# Altium PCB ROV_PCB_CHARGE.PcbDoc
Units mil, origin at the board's own origin, x right, y up, seen from the top; angles counter-clockwise.
Board outline 2755.91 x 1948.72 mil, 2 copper layers (Top Layer, Bottom Layer); 11 components, 12 nets, 52 pads, 0 vias.
Unrouted connection lines stored in the file: 4.
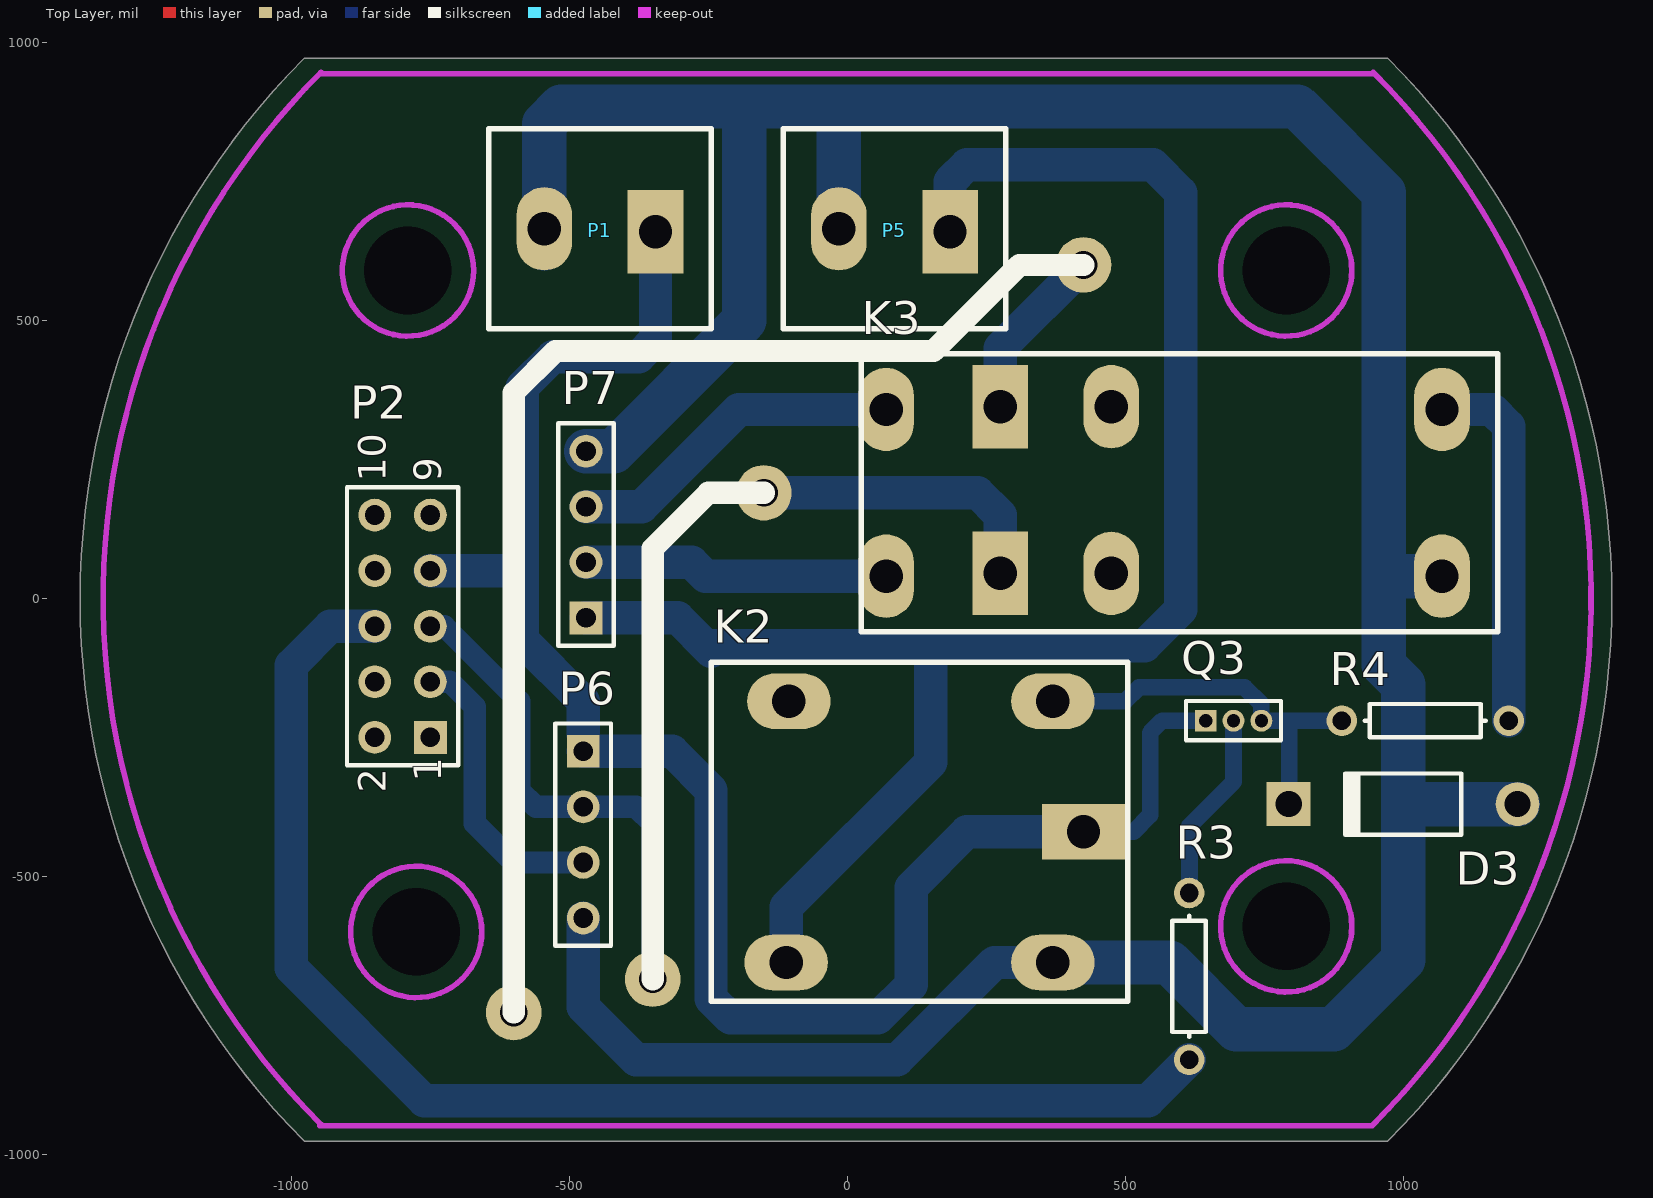
[diagram p0: Top Layer view]
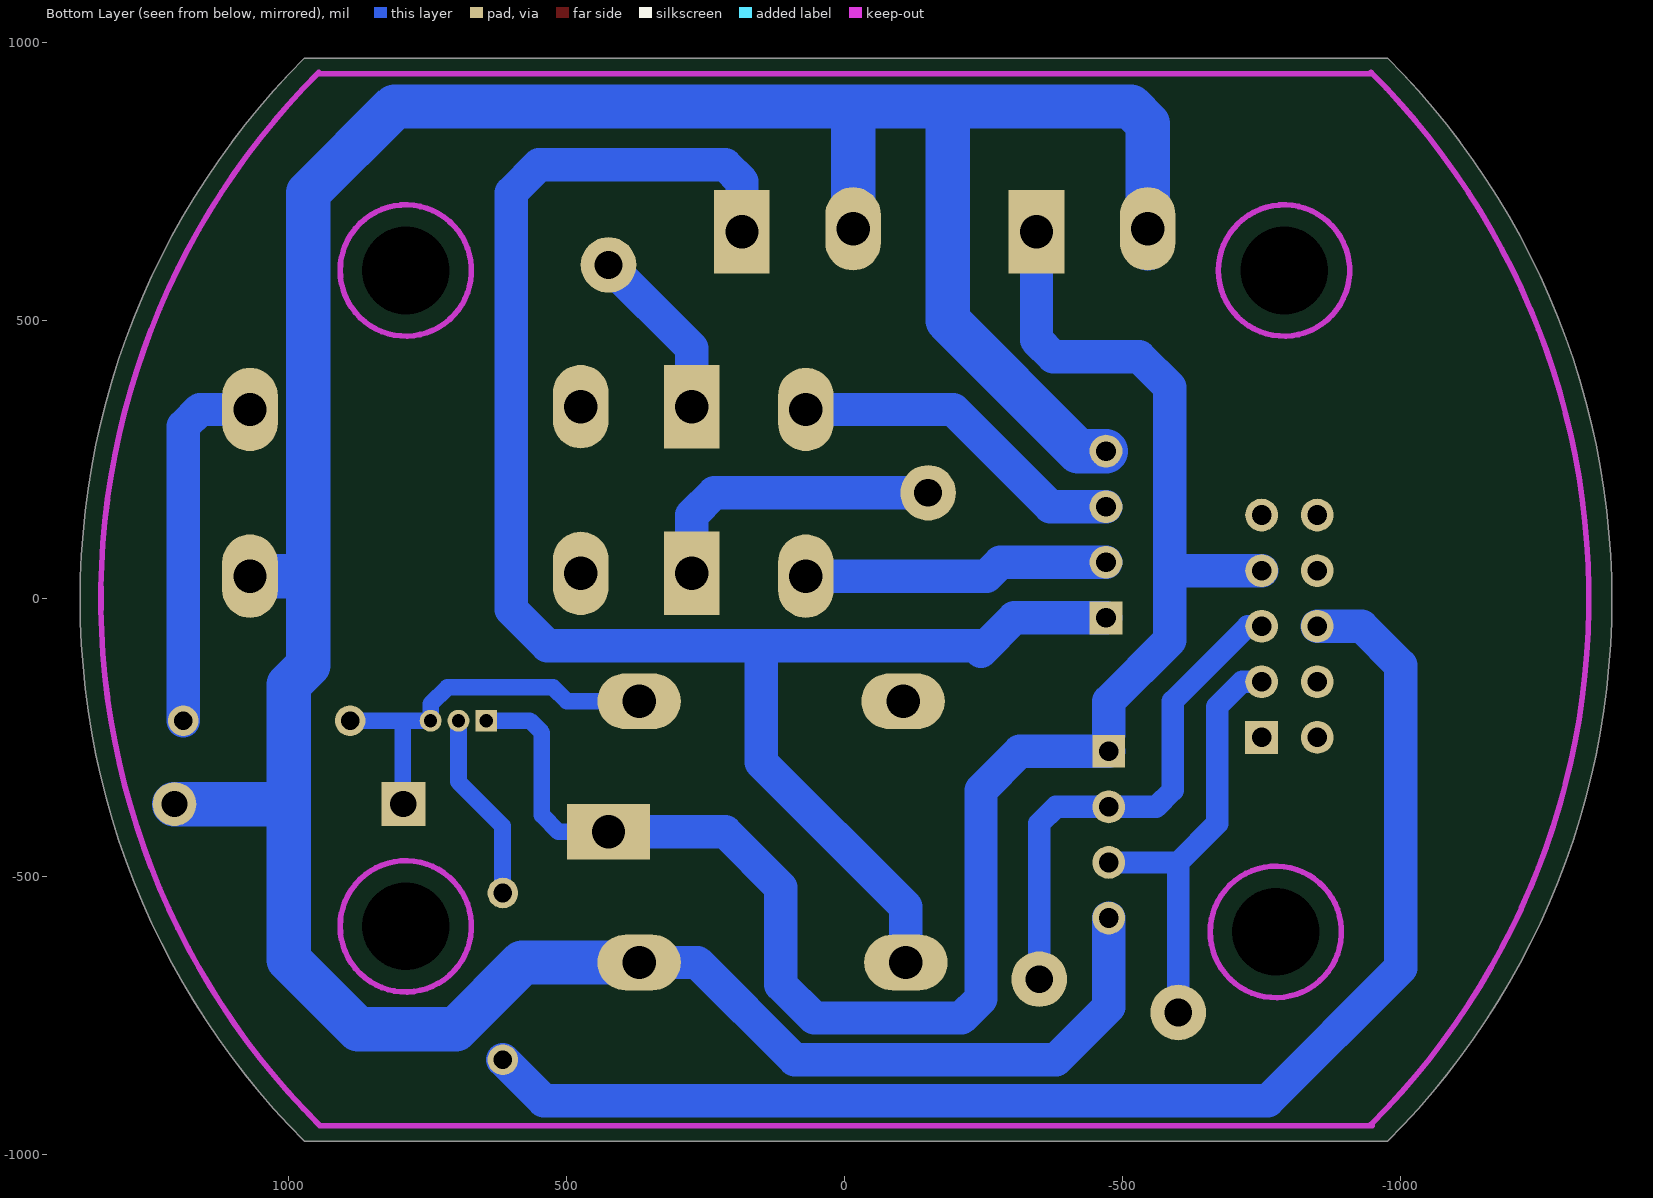
[diagram p1: Bottom Layer view, seen from below]

## Layer stack, top to bottom
Top Solder: solder mask 0.4, Solder Resist, Dk 3.5
Top Layer: signal copper 1.4
Dielectric 1: dielectric 12.6, FR-4, Dk 4.8
Bottom Layer: signal copper 1.4
Bottom Solder: solder mask 0.4, Solder Resist, Dk 3.5

## Board outline
-976.6,-976.6 972.12,-976.6 ccw(c-2.24,-2.24) 972.12,972.12 -976.6,972.12 ccw(c-2.24,-2.24)

## Design rules (kind name [scope] priority, off if disabled: settings)
Clearance [All] p1: gap=10
PolygonConnect [All] p1: connectstyle=Relief reliefconductorwidth=10 reliefentries=4 polygonreliefangle="90 Angle" airgapwidth=10
RoomDefinition ROV_PCB_CHARGE [InComponentClass('ROV_PCB_CHARGE')] p1: confinementstyle=ConfineOut formatcopy=TRUE lockcomponents=FALSE outline 1420,-920 4850,-920 4850,355 1420,355
RoutingVias [All] p1: holewidth=28 width=50 viastyle="Through Hole" minholewidth=28 minwidth=50 maxholewidth=28 maxwidth=50
SolderMaskExpansion [All] p1: expansion=4
Width [All] p1: maxlimit=80 minlimit=10 preferedwidth=40 minimp=50.000000 maximp=50.000000 favimp=50.000000
30 further rules are at their usual default settings.

## Components (designator, comment, footprint, x,y, rotation, side; value= is the part's Value field where it differs from the comment)
D3 "1N4007" DO-41 1000,-370 r180 top
K2 "Elmatis br.151" REL151 130,-420 r270 top
K3 "Elmatis br.112" REL112 595,190 r270 top
P1 "Battery" KLEMA -445,665 r180 top
P2 "Header logic" HDR2X5 -750,-250 r90 top
P5 "Charger power" KLEMA 85,665 r180 top
P6 "Battery balance" HDR1X4 -475,-275 r270 top
P7 "Charger balance" HDR1X4 -470,-35 r90 top
Q3 "PNP 2N3906" MHDR1X3 645,-220 r0 top
R3 "10k" AXIAL-0.3 615,-680 r90 top
R4 "47" AXIAL-0.3 1040,-220 r180 top

## Footprints (in the part's own frame and the unit in brackets; to place one, negate y for a bottom-side part, rotate by r counter-clockwise, add the part's x,y. Pads: shape width x height; smd on the part's side, far side on the other; paste and mask are expansions set on the pad)
AXIAL-0.3 [mm] "Axial Device, Thru-Hole; 2 Leads; 0.3 in Pin Spacing"
  round 1.4 hole 0.85: 1(-3.81,0) 2(3.81,0)
  silkscreen extent -2.77,-0.76 2.77,0.76
DO-41 [mm] "Diode, Axial; Body 5.2 x 2.7 mm (LxDia. max), Lead Dia. 0.86 mm (max)"
  round 2 hole 1.2: 1(-5.23,0)
  rect 2x2 hole 1.2: 2(5.23,0)
  silkscreen extent -2.65,-1.4 2.75,1.4
HDR1X4 [mm] "Connector; Header; 4 Position"
  rect 1.5x1.5 hole 0.9: 1(0,0)
  round 1.5 hole 0.9: 2(2.54,0) 3(5.08,0) 4(7.62,0)
  silkscreen extent -1.27,-1.27 8.89,1.27
HDR2X5 [mm] "Connector; Header; 5x2 Position"
  rect 1.5x1.5 hole 0.9: 1(0,0)
  round 1.5 hole 0.9: 2(0,2.54) 3(2.54,0) 4(2.54,2.54) 5(5.08,0) 6(5.08,2.54) 7(7.62,0) 8(7.62,2.54) 9(10.16,0) 10(10.16,2.54)
  silkscreen extent -1.27,-1.27 11.43,3.81
KLEMA [mil]
  rect 100x150 hole 60: 1(-100,5)
  oval 100x150 hole 60: 2(100,0)
  silkscreen extent -200,-180 200,180
MHDR1X3 [mm] "Connector; Header; 3 Position"
  rect 1x1 hole 0.6: 1(0,0)
  round 1 hole 0.6: 2(1.27,0) 3(2.54,0)
  silkscreen extent -0.9,-0.9 3.44,0.9
REL112 [mil]
  rect 150x100 hole 60: 1(-155,-320) 3(145,-320)
  oval 150x100 hole 60: 2(-150,-525) 4(150,-525) 5(-150,475) 6(150,475) 7(-155,-120) 8(145,-120)
  silkscreen extent -250,-570 250,575
REL151 [mil]
  rect 100x150 hole 60: 1(0,295)
  oval 100x150 hole 60: 2(235,-240) 3(-235,240) 4(235,240) 5(-235,-235)
  silkscreen extent -305,-375 305,375

## Part data
D3: library part "Diode 1N4007", "1 Amp General Purpose Rectifier"
K2: library part Relay-SPST, "Single-Pole Single-Throw Relay"
K3: library part Relay-DPST, "Dual-Pole Single-Throw Relay"
P1 P5: library part "Header 2", "Header, 2-Pin"
P2: library part "Header 5X2", "Header, 5-Pin, Dual row"
P6 P7: library part "Header 4", "Header, 4-Pin"
Q3: library part PNP, "PNP Bipolar Transistor"
R3 R4: library part Res1, "Resistor"

## Free pads (board coordinates)
  round 50 hole 157.48: 0(-790.28,590) 0(-775.54,-600) 0(789.72,-590) 0(789.72,590)
  round 100 hole 50: 2(-350,-685) 3(-150,190) 4(425,600) 5(-600,-745)

## Nets (pads, with @x,y where several pads share a name; then routed paths per layer and width w, separated by ;. In a path a pad name is that pad's centre, name@x,y a point inside that pad or via, vN(x,y) a via of type N, cw(c..) or ccw(c..) an arc to the next point about the centre after c; other vN are vias at no path point)
DGND: P2.8 P2.9 P2.10
GND: D3.1 K2.4 K3.6 P1.2 P5.2 P6.4 P7.4 | length 6322.3
  Bottom Layer w60: P6.4 -475,-735 -380,-830 90,-830 265,-655 K2.4
  Bottom Layer w80: P1.2@-545,630 -545,854.28 -514.28,885 -185,885 ; P7.4 -420,265 -185,500 -185,885 ; P5.2 -15,885 ; K2.4 580,-655 700,-775 875,-775 1000,-650 1000,-155 965,-120 965,730 810,885 -15,885 ; 970,40 K3.6 ; 1025,-370 D3.1 ; -185,885 -15,885
NetD3_2: D3.2 K2.3 Q3.3 R4.2 | length 721.9
  Bottom Layer w30: K2.3 500,-185 525,-160 715,-160 745,-190 Q3.3 795,-220 ; D3.2@795,-369.09 795,-220 ; R4.2 795,-220
NetK2_2: K2.2 P5.1 P7.1 | length 3087.6
  Bottom Layer w60: P7.1 -305,-35 -245,-95 ; -245,-85 150,-85 ; K2.2 -110,-555 150,-295 150,-85 ; P5.1 185,750 215,780 550,780 600,730 600,-20 535,-85 150,-85
NetK3_1: K3.1 P2.3 P6.3 pad.4 pad.5 | length 1119.8
  Bottom Layer w40: P2.3 -715,-150 -670,-195 -670,-405 -600,-475 ; pad.5 -600,-475 ; P6.3 -600,-475
  Bottom Layer w60: K3.1 275,450 pad.4
NetK3_2: K3.2 P7.3 | length 612.5
  Bottom Layer w60: P7.3 -370,165 -195,340 K3.2
NetK3_3: K3.3 P2.5 P6.2 pad.2 pad.3 | length 1467.3
  Bottom Layer w40: P2.5 -725,-50 -590,-185 -590,-345 -560,-375 P6.2 -380,-375 -350,-405 pad.2
  Bottom Layer w60: pad.3 235,190 275,150 K3.3
NetK3_4: K3.4 P7.2 | length 550.4
  Bottom Layer w60: P7.2 -280,65 -255,40 K3.4
NetK3_5: K3.5 R4.1 | length 662.4
  Bottom Layer w60: K3.5 1160,340 1190,310 R4.1
NetP2_6: P2.6 R3.1 | length 2468.4
  Bottom Layer w60: P2.6 -930,-50 -1000,-120 -1000,-665 -761.23,-903.77 541.24,-903.77 R3.1
NetQ3_2: Q3.2 R3.2 | length 342.8
  Bottom Layer w30: R3.2@615.77,-530 615.77,-409.23 695,-330 Q3.2
VBATT: K2.1 P1.1 P2.7 P6.1 Q3.1 | length 3255.3
  Bottom Layer w30: K2.1 515,-420 545,-390 545,-241.57 566.57,-220 Q3.1
  Bottom Layer w60: P2.7 -585,50 ; P6.1 -315,-275 -245,-345 -245,-720 -210,-755 55,-755 115,-695 115,-520 215,-420 K2.1 ; -475,-245 -475,-185 -585,-75 -585,380 -530,435 -375,435 -345,465 P1.1
pads on no net: K2.5 K3.7 K3.8 P2.1 P2.2 P2.4

## Keep-outs
Keep-Out Layer:
  circle w10: c-790.28,590 r118.11
  circle w10: c789.72,590 r118.11
  circle w10: c-775.54,-600 r118.11
  circle w10: c789.72,-590 r118.11
  lines w10: -948.8,-948.77 944.24,-948.77 ; -948.8,944.28 944.24,944.28 ; -946.8,-946.52 cw(c-0.28,0) -946.8,946.52 ; 946.24,-946.52 ccw(c-0.28,0) 946.24,946.52

## Silkscreen, mask and mechanical layers (free items; w line width, h text height)
Top Overlay:
  lines w40: -600,-745 -600,370 -525,445 155,445 310,600 425,600 ; -350,-685 -350,90 -250,190 -150,190
Mechanical 1:
  lines w10: -976.6,-976.6 972.12,-976.6 ; -976.6,972.12 972.12,972.12 ; -974.64,-974.36 cw(c-0.28,0) -974.64,974.36 ; 974.08,-974.36 ccw(c-0.28,0) 974.08,974.36

## Dimensions
-976.6,972.12 to 972.12,972.12 on Mechanical 2
-0.28,0 to -1635.54,195 on Mechanical 2

## Text inside footprints (layer, text, board x,y; h text height)
P2: Top Overlay "10" at -830,210 h50 r90; Top Overlay "9" at -730,210 h50 r90; Top Overlay "1" at -730,-330 h50 r90; Top Overlay "2" at -830,-350 h50 r90